# Altium PCB STM32_PCB.PcbDoc
Units mm, origin at the board's own origin, x right, y up, seen from the top; angles counter-clockwise.
Board outline 47 x 43 mm, 4 copper layers (L1 (Signal), L2 (GND), L3 (GND), L4 (Signal)), stack 1.591 mm thick; 47 components, 55 nets, 267 pads, 160 vias.
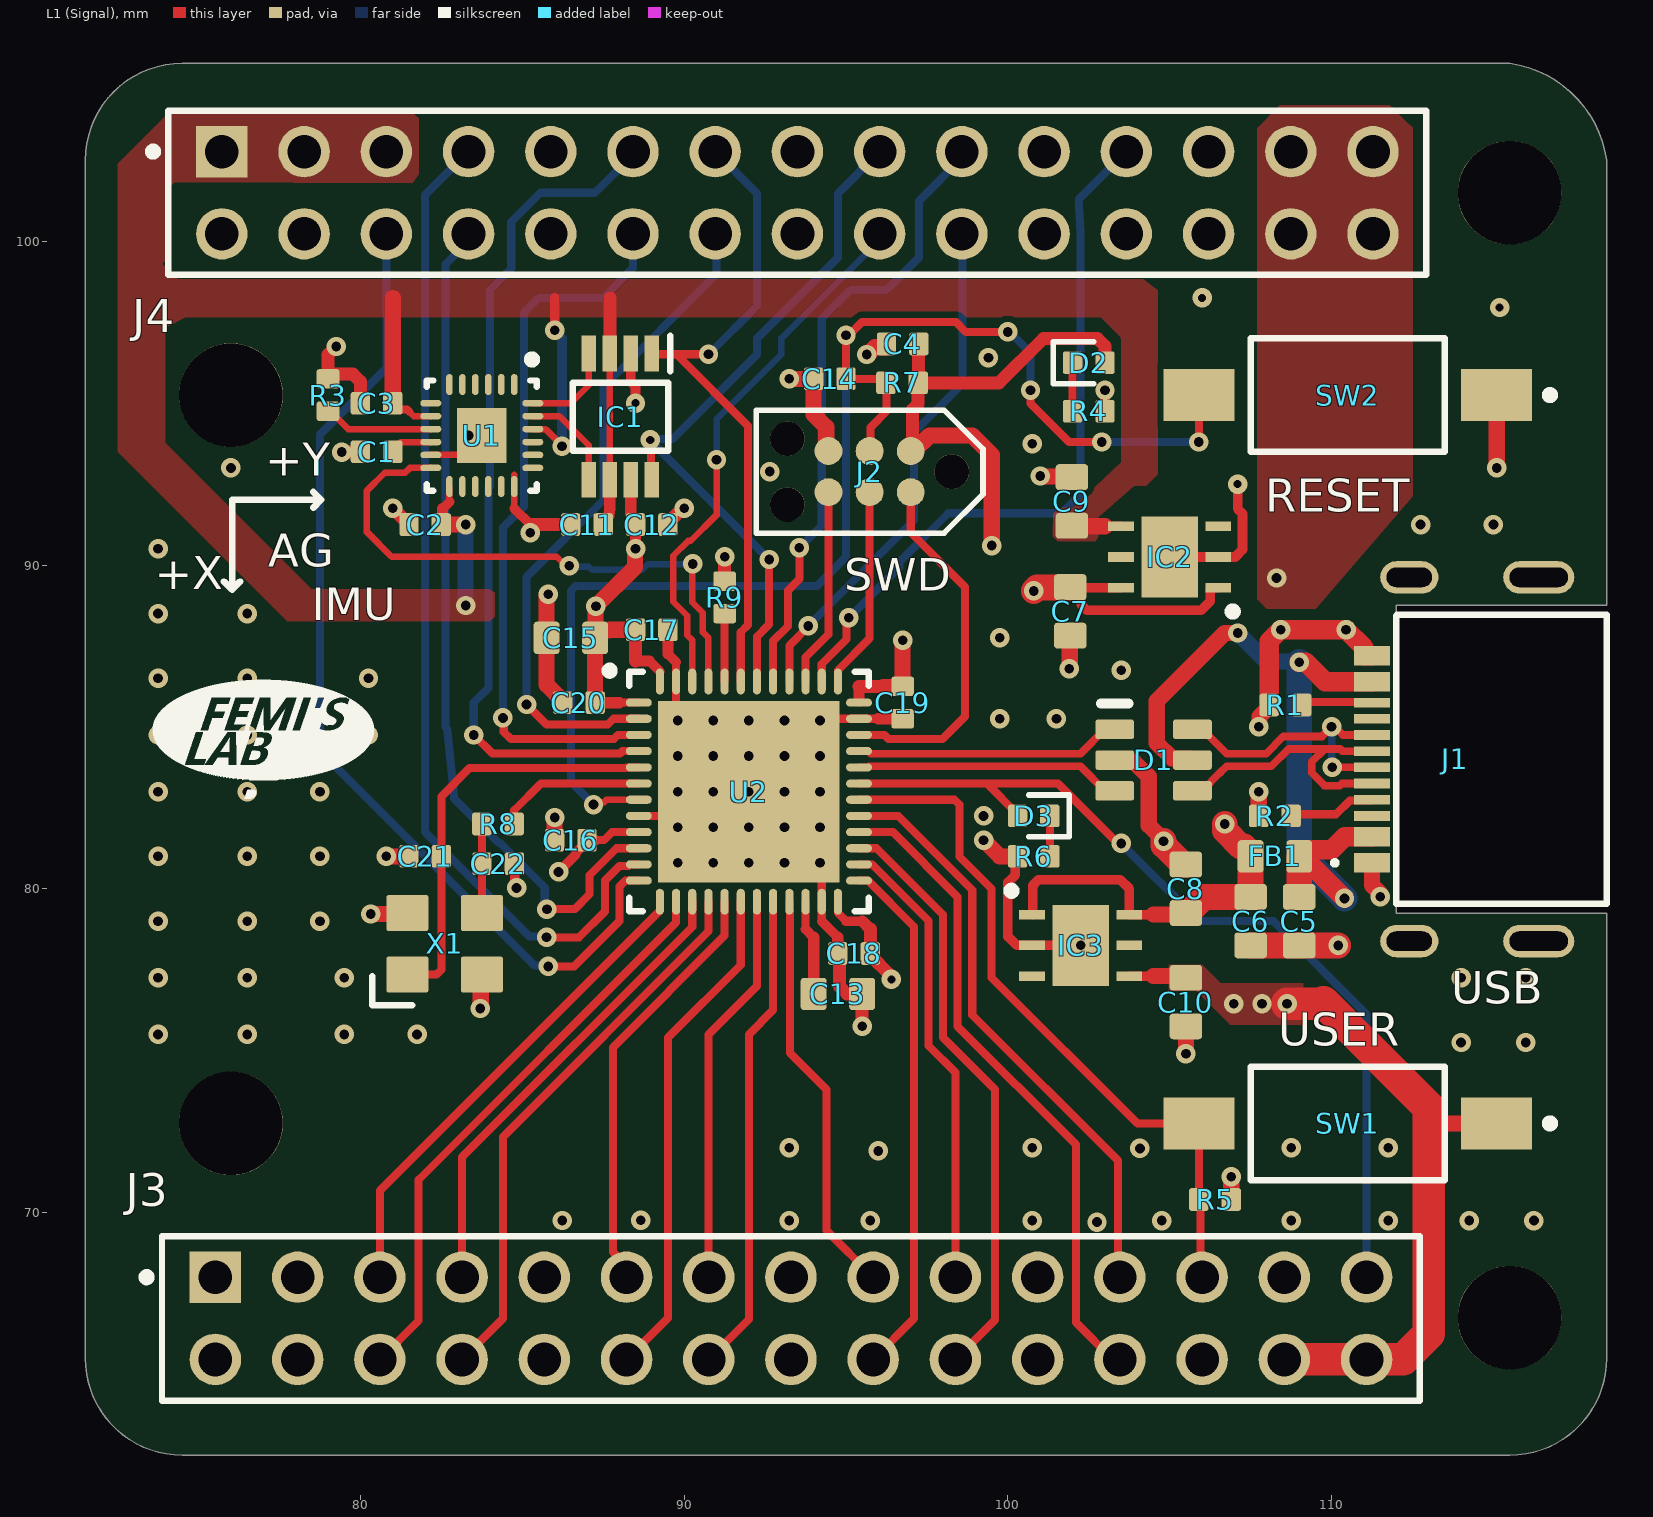
[diagram p0: L1 (Signal) view]
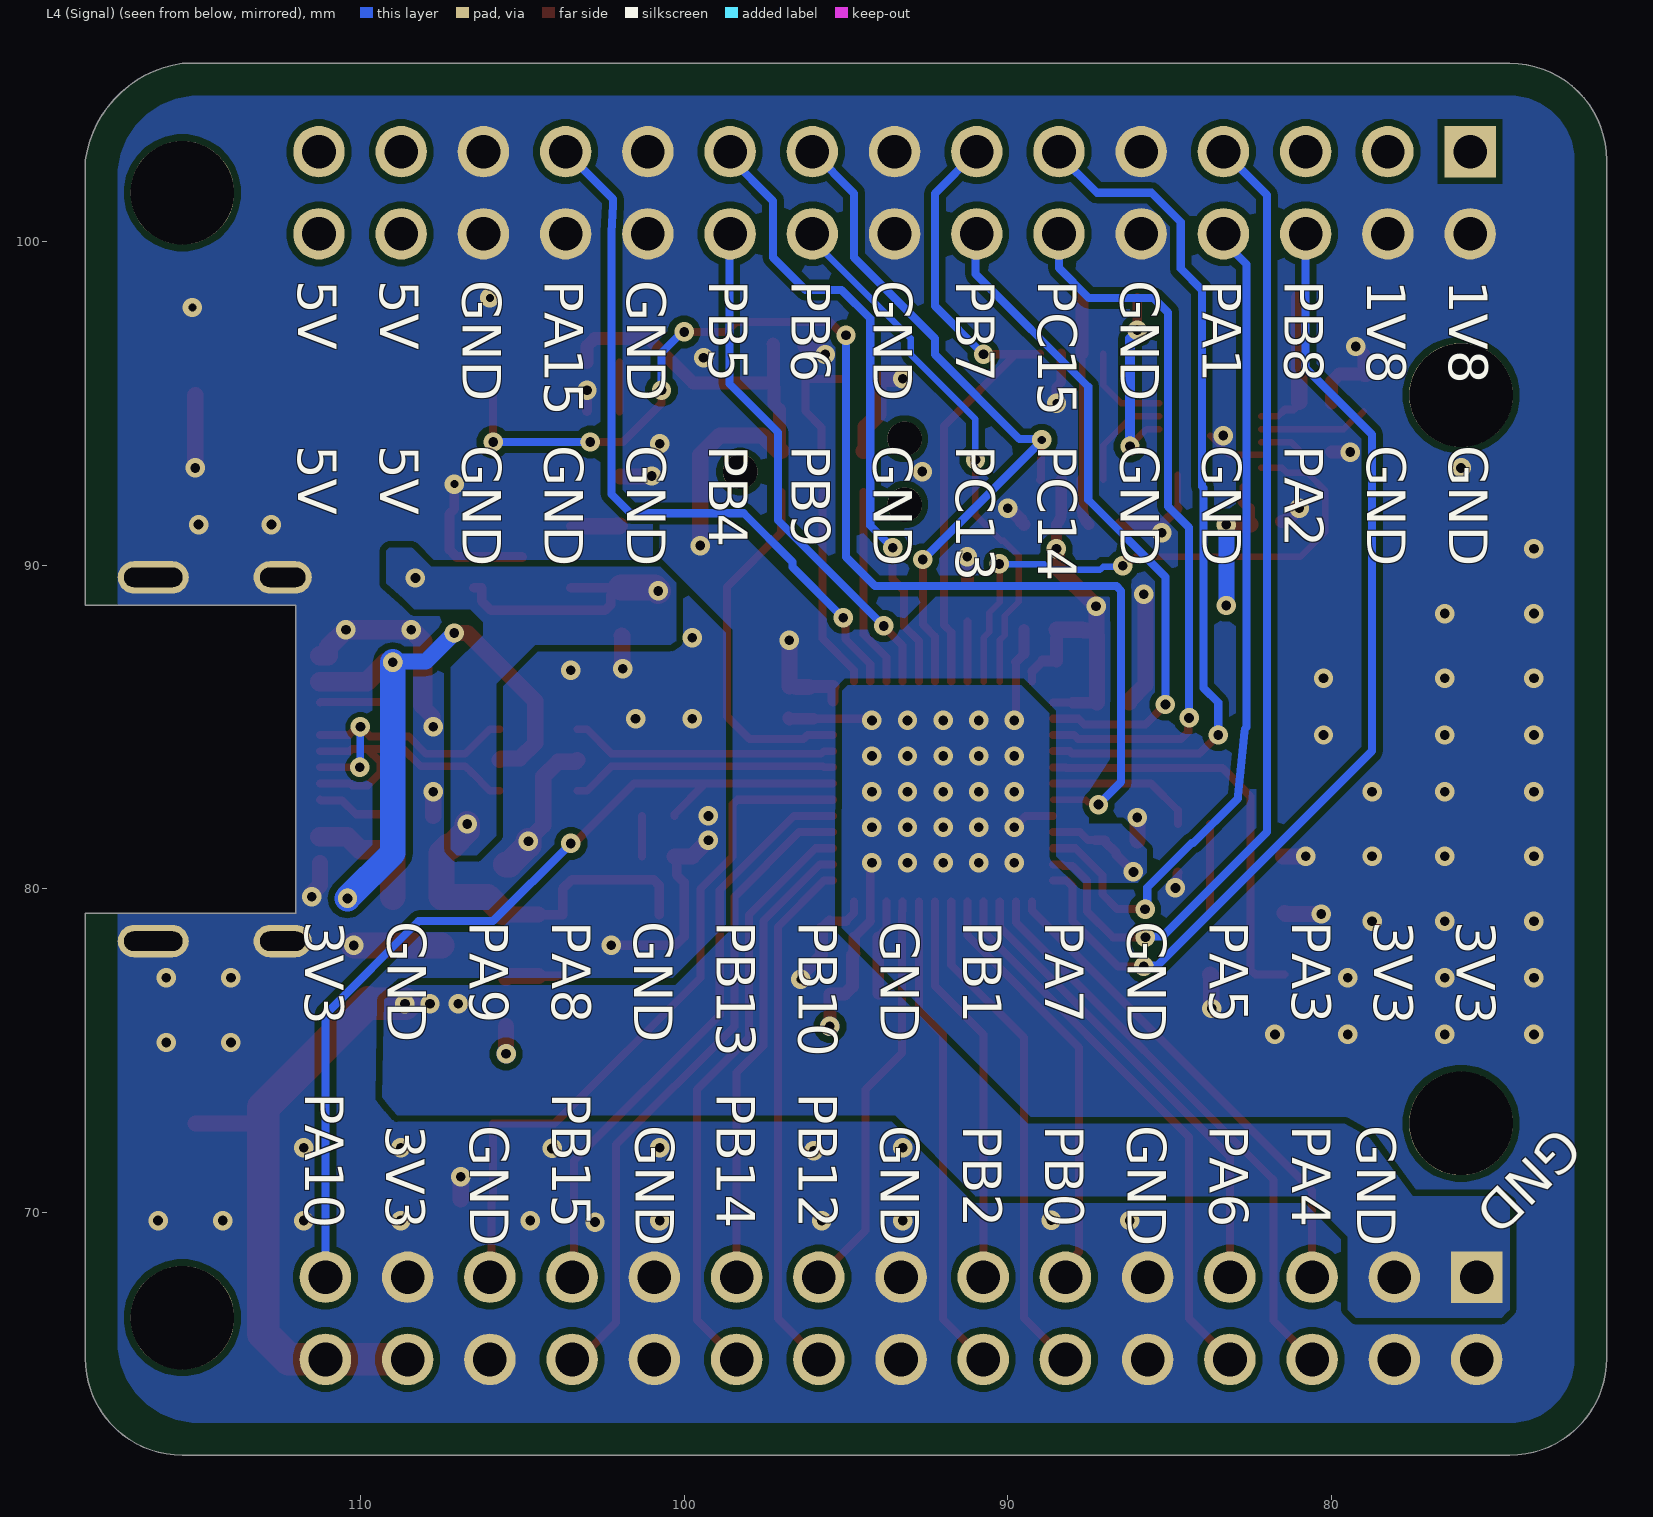
[diagram p1: L4 (Signal) view, seen from below]
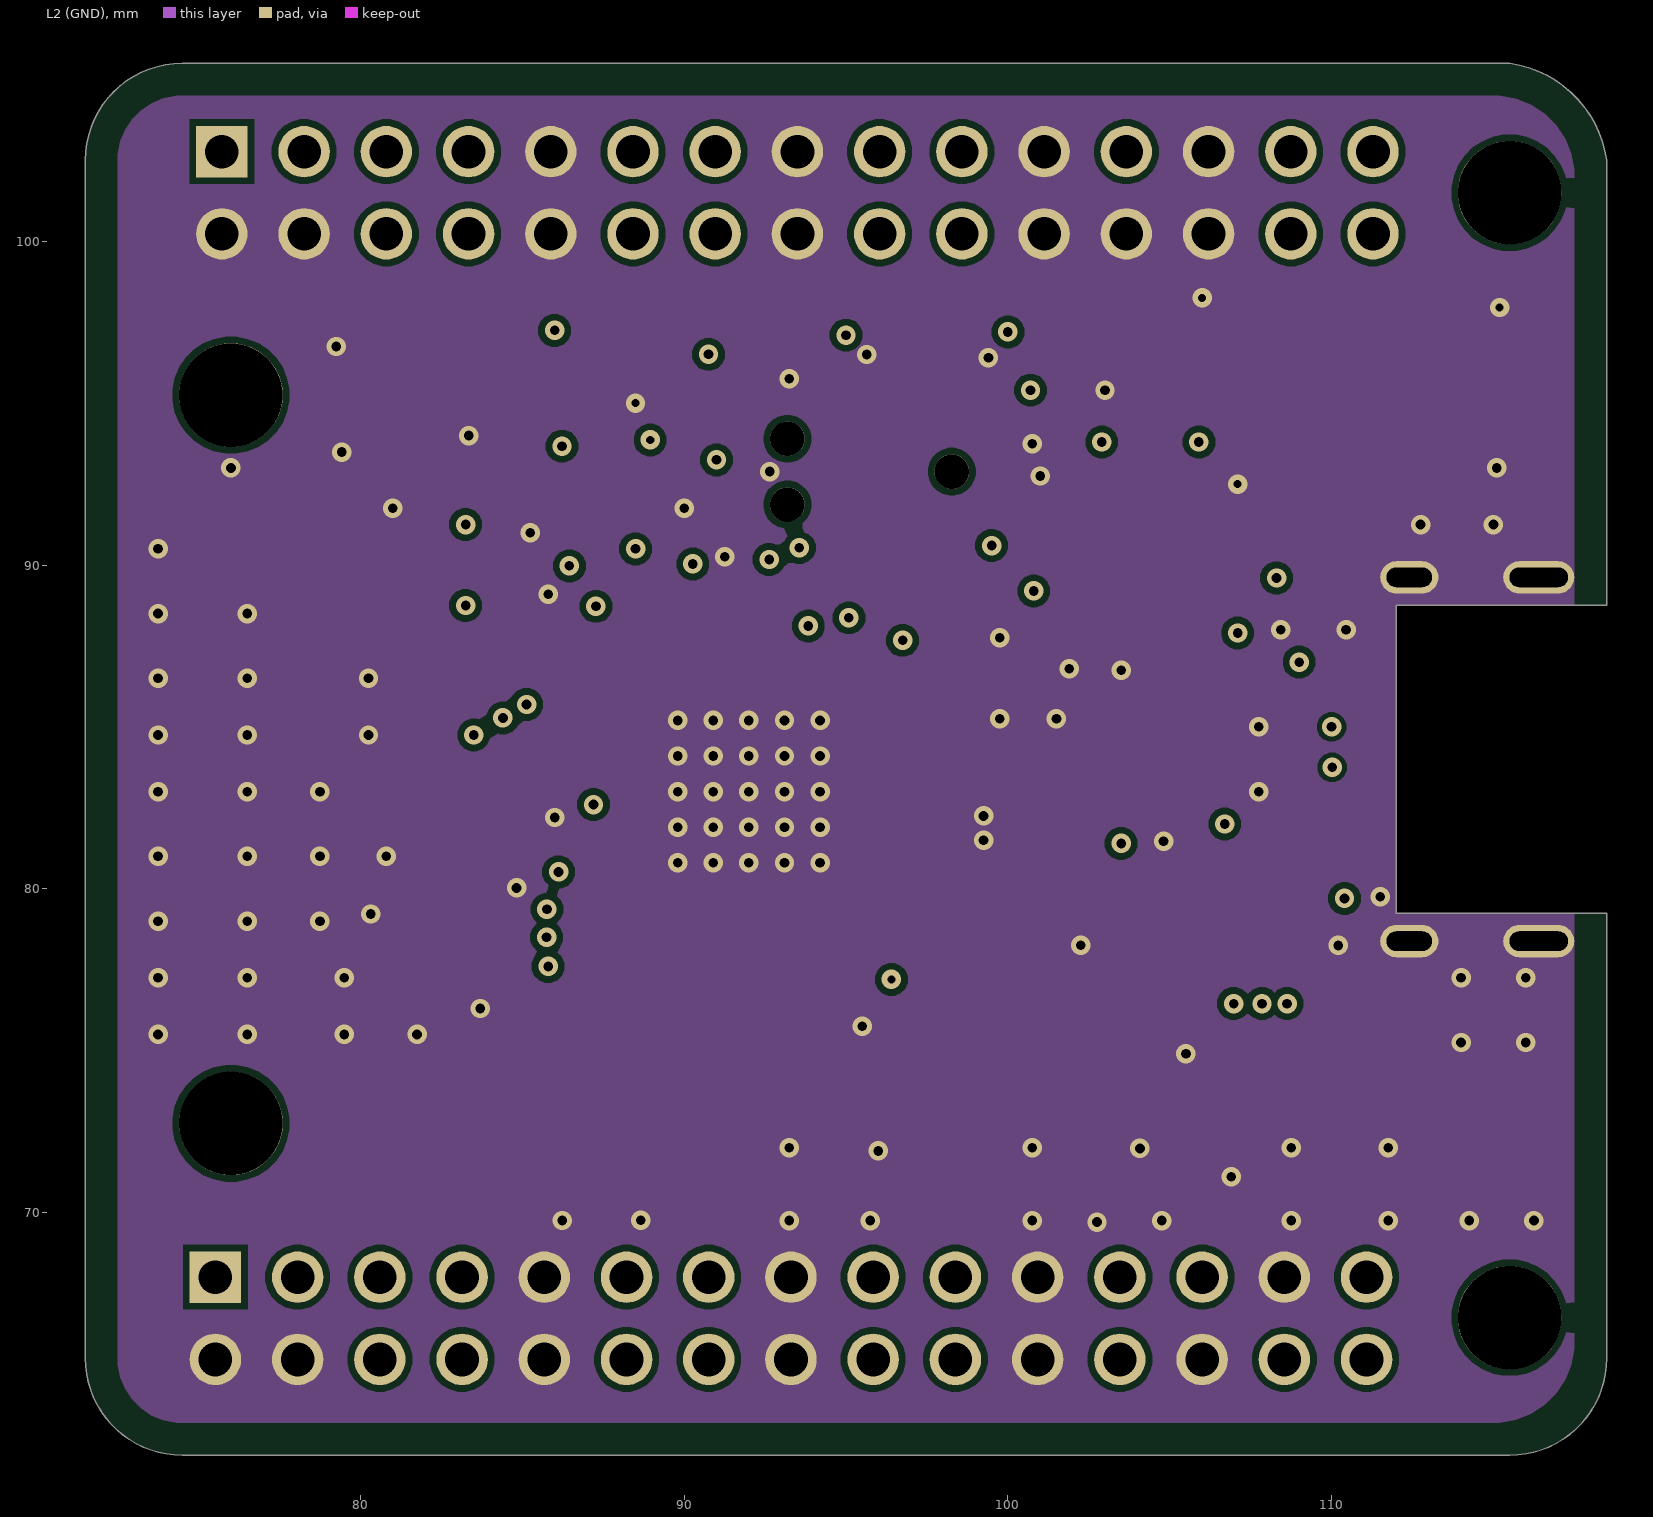
[diagram p2: L2 (GND)]
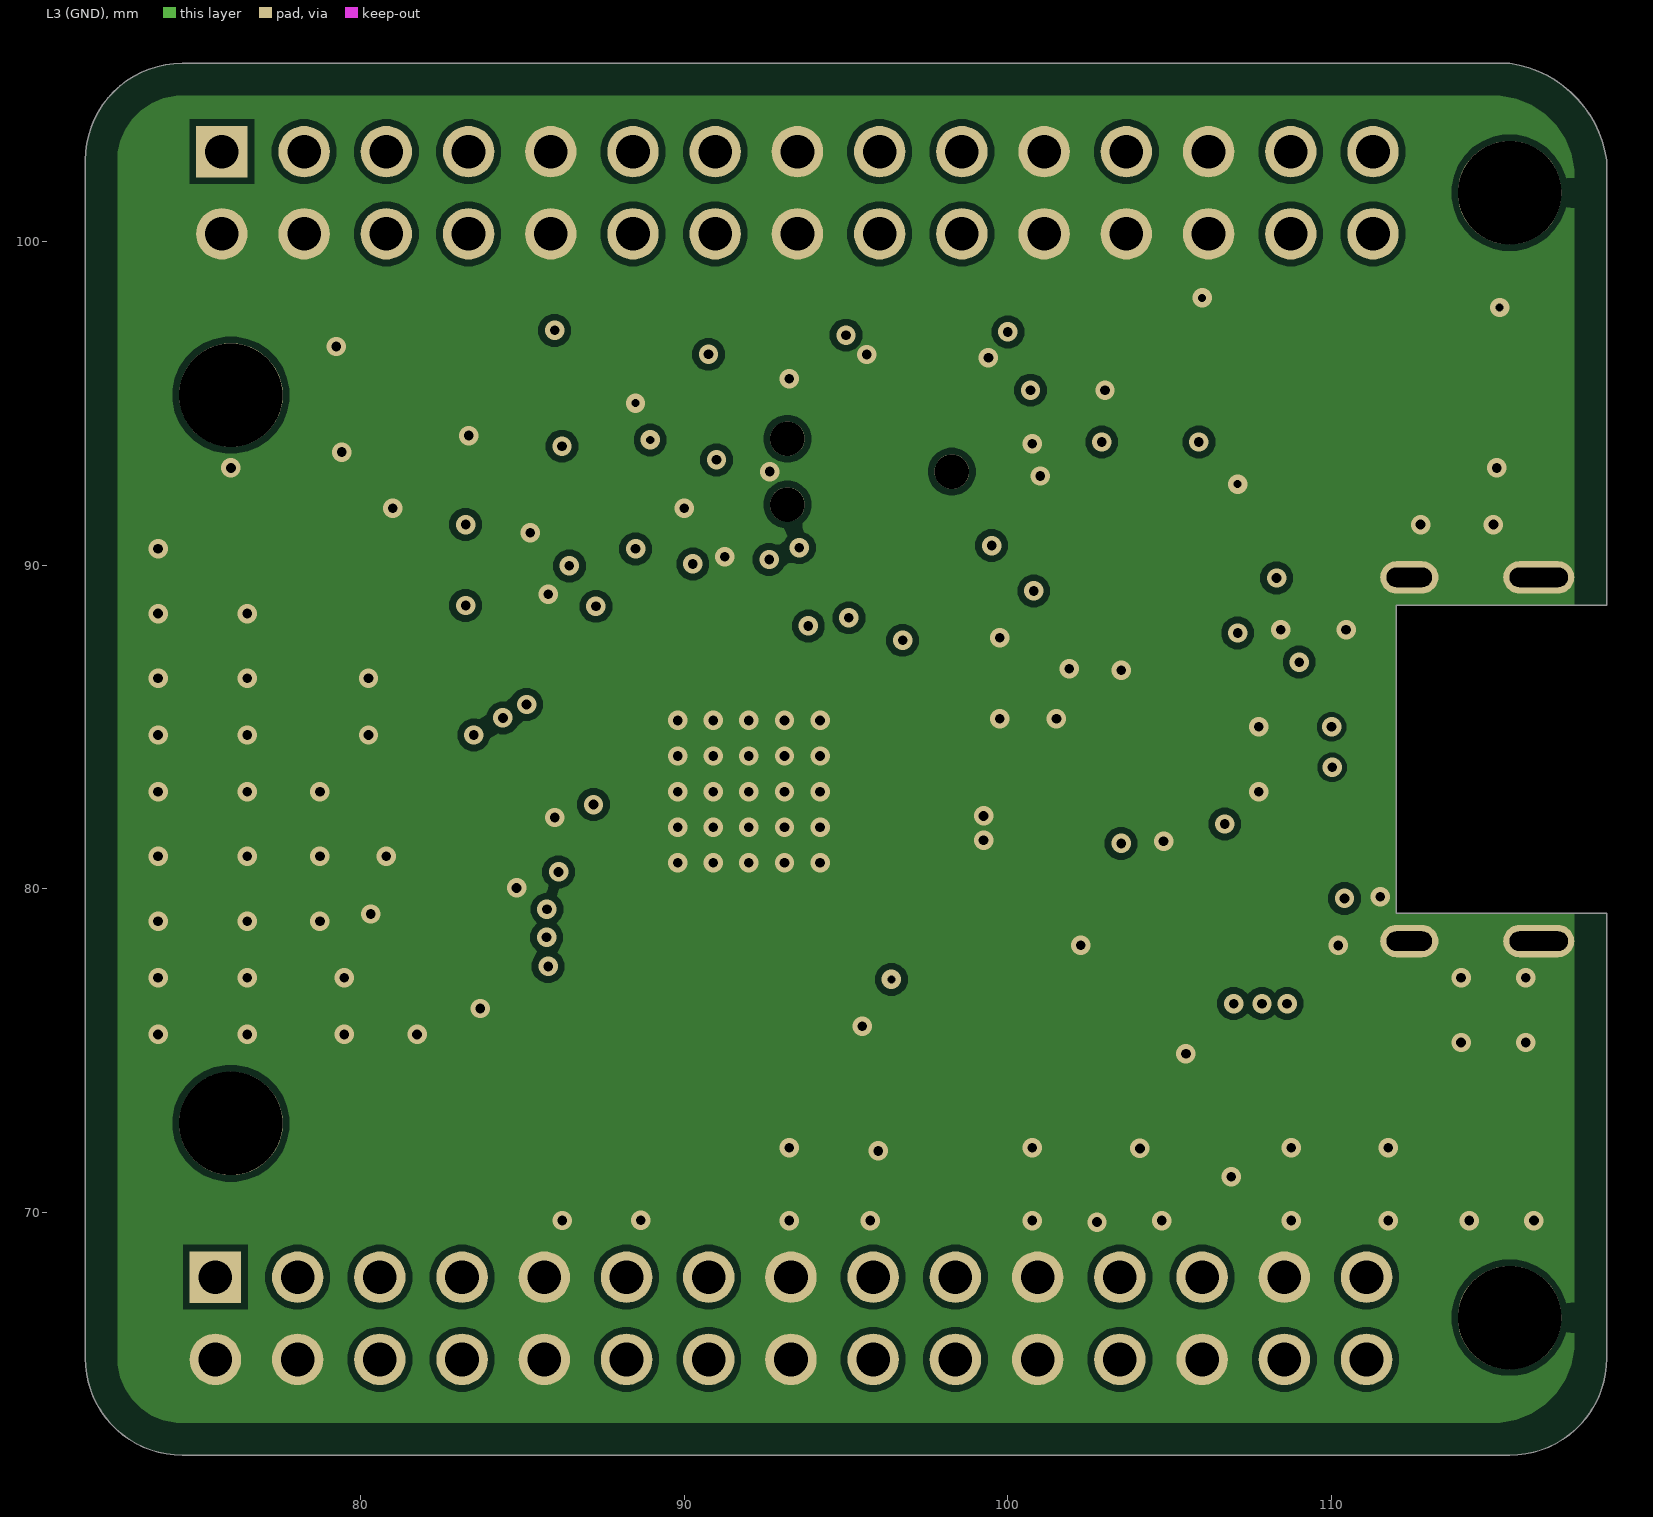
[diagram p3: L3 (GND)]
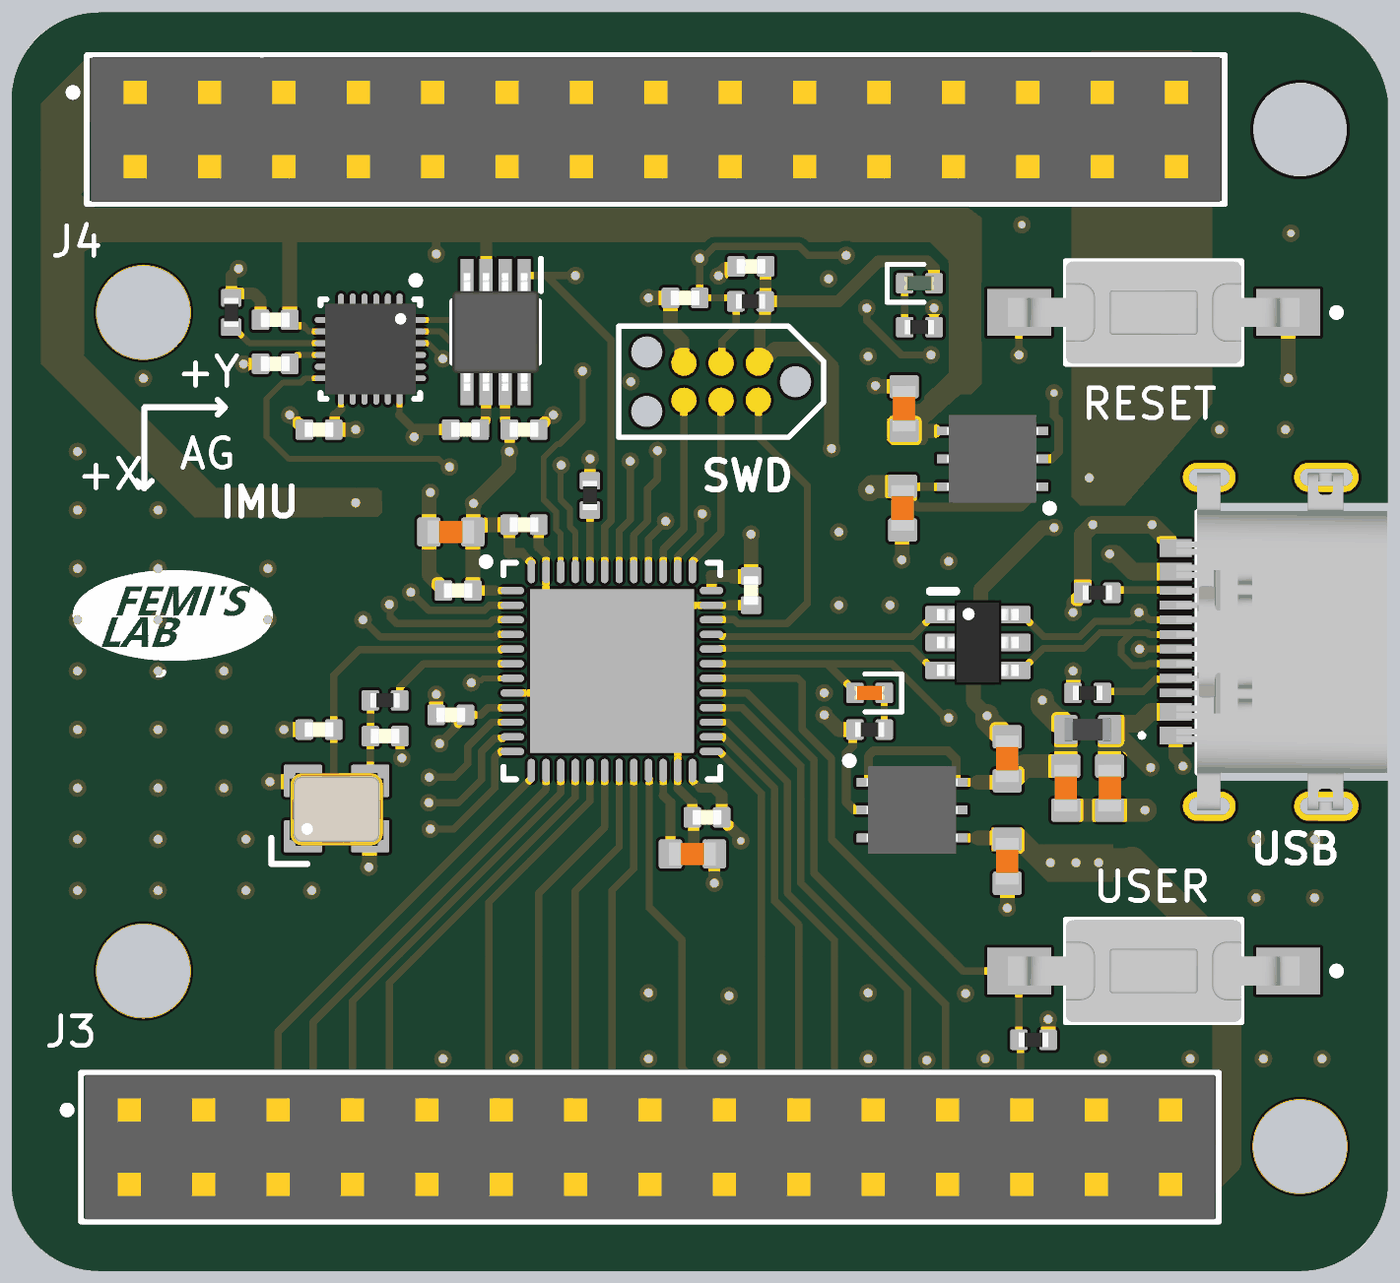
[diagram p4: 3D render of the assembled board from above, using the file's embedded part models]

## Layer stack, top to bottom
Top Solder: solder mask 0.0254, SM-001, Dk 4
L1 (Signal): signal copper 0.035
Dielectric 1: prepreg 0.2104, PP-017, Dk 4.4
L2 (GND): signal copper 0.0175
Dielectric 3: core 1.065, Core-039, Dk 4.6
L3 (GND): signal copper 0.0175
Dielectric 5: prepreg 0.2104, PP-017, Dk 4.4
L4 (Signal): signal copper 0.035
Bottom Solder: solder mask 0.0254, SM-001, Dk 4

## Board outline
71.5,65.5 71.5,102.5 cw(c74.5,102.5) 74.5,105.5 115.5,105.5 cw(c115,102) 118.5,102.5 118.5,88.75 112,88.75 112,79.25 118.5,79.25 118.5,65.5 cw(c115.5,65.5) 115.5,62.5 74.5,62.5 cw(c74.5,65.5)

## Design rules (kind name [scope] priority, off if disabled: settings)
Clearance USB_DP_Clearance [(InNet('ESD_USB_D_N') OR InNet('ESD_USB_D_P') OR InNet('USB_D_N') OR InNet('USB_D_P'))] p1: gap=0.15 ignorepadtopadclearanceinfootprint=FALSE
Clearance [All] p2: gap=0.2 ignorepadtopadclearanceinfootprint=FALSE
DiffPairsRouting [All] p1: maxlimit=0.152 minlimit=0.127 mostfreqgap=0.152 toplayer_mingap=0.152 toplayer_minwidth=0.235 toplayer_maxwidth=0.235 toplayer_prefwidth=0.235 bottomlayer_mingap=0.152 bottomlayer_minwidth=0.235 bottomlayer_maxwidth=0.235 bottomlayer_prefwidth=0.235 impedanceprofiledriven=TRUE impedanceprofileid={366350EE-0790-4BE7-8783-D614B65B4645} impedanceprofilevalue=90.000000 maxuncoupledlength=12.7
HoleSize [All] p1: absolutevalues=TRUE maxlimit=4 minlimit=0.025 maxpercent=80.000 minpercent=20.000
MinimumSolderMaskSliver [All] p1: minsoldermaskwidth=0.01
PolygonConnect [All] p1: connectstyle=Direct reliefconductorwidth=0.254 reliefentries=4 polygonreliefangle="90 Angle" airgapwidth=0.254
RoutingVias [All] p1: holewidth=0.3 width=0.7 viastyle="Through Hole" minholewidth=0.2 minwidth=0.3 maxholewidth=0.4 maxwidth=0.9
SilkToSolderMaskClearance [IsPad] p1: minsilkscreentomaskgap=0.1 clearancetoexposedcopper=TRUE
SolderMaskExpansion [All] p1: expansion=0.102 istentingtop=FALSE
SupplyNets "Schematic Supply Nets_4" [InNet('+3V3')] p1: voltage=0.000
SupplyNets "Schematic Supply Nets_3" [InNet('GND')] p2: voltage=0.000
SupplyNets "Schematic Supply Nets_2" [InNet('+5V')] p3: voltage=0.000
SupplyNets "Schematic Supply Nets_1" [InNet('+1V8')] p4: voltage=0.000
SupplyNets "Schematic Supply Nets" [InNet('VBUS')] p5: voltage=0.000
UnRoutedNet [All] p1: checkbadconnections=TRUE
Width [All] p1: maxlimit=1 minlimit=0.2 preferedwidth=0.3 midlayer1_minwidth=0.254 midlayer1_maxwidth=0.254 midlayer1_prefwidth=0.254 midlayer2_minwidth=0.254 midlayer2_maxwidth=0.254 midlayer2_prefwidth=0.254 minimp=50.000000 maximp=50.000000 favimp=50.000000
25 further rules are at their usual default settings.

## Classes and differential pairs
differential pair class DIFF_USB_ESD: ESD_USB_D
differential pair class DIFF_USB: USB_D
differential pair ESD_USB_D: +ESD_USB_D_P -ESD_USB_D_N
differential pair USB_D: +USB_D_P -USB_D_N

## Components (designator, comment, footprint, x,y, rotation, side; value= is the part's Value field where it differs from the comment)
C1 "100n" CAP_0402 80.5,93.5 r180 top
C2 "100n" CAP_0402 82,91.25 r180 top
C3 "100n" CAP_0402 80.5,95 r180 top
C4 "100n" CAP_0402 96.75,96.828 r180 top
C5 "2u2" CAP_0603 109,79 r90 top
C6 "2u2" CAP_0603 107.5,79 r90 top
C7 "1u" CAP_0603 101.928,88.568 r90 top
C8 "1u" CAP_0603 105.5,80 r270 top
C9 "1u" CAP_0603 101.978,91.966 r270 top
C10 "1u" CAP_0603 105.5,76.5 r90 top
C11 "100n" CAP_0402 87,91.25 r180 top
C12 "100n" CAP_0402 89,91.25 r0 top
C13 "2u2" CAP_0603 94.75,76.75 r180 top
C14 "100n" CAP_0402 94.5,95.75 r180 top
C15 "2u2" CAP_0603 86.5,87.75 r0 top
C16 "100n" CAP_0402 86.5,81.5 r180 top
C17 "100n" CAP_0402 89,88 r0 top
C18 "100n" CAP_0402 95.25,78 r180 top
C19 "100n" CAP_0402 96.75,85.75 r270 top
C20 "100n" CAP_0402 86.75,85.75 r180 top
C21 "10p" CAP_0402 82,81 r180 top
C22 "10p" CAP_0402 84.255,80.775 r0 top
D1 "USBLC6-2SC6" SOT-23-6 104.5,83.975 r270 top
D2 "GREEN" LED_0402_GREEN 102.5,96.25 r180 top
D3 "RED" LED_0402_RED 100.8,82.25 r0 top
FB1 "FB0603" FB_0603 108.25,81 r180 top
IC1 "TCA9406DCTR" SOP65P400X130-8N 88.028,94.584 r270 top
IC2 "LD39100PU18RY" SON95P300X300X90-7N-D 105,90.25 r180 top
IC3 "LD39100PU33RY" SON95P300X300X90-7N-D 102.25,78.25 r0 top
J1 "216990-0003" 2169900003 115.25,84 r90 top
J2 "TC2030-NL" TC2030-NL-FP 95.73,92.885 r180 top
J3 "SSW-115-02-G-D" FP-SSW-115-02-G-D-MFG 93.3,66.73 r180 top
J4 "SSW-115-02-G-D" FP-SSW-115-02-G-D-MFG 93.5,101.5 r180 top
R1 "5.1k" RES_0402 108.575,85.675 r0 top
R2 "5.1k" RES_0402 108.25,82.25 r0 top
R3 "0R" RES_0402 79,95.25 r270 top
R4 "1k" RES_0402 102.5,94.75 r180 top
R5 "10k" RES_0402 106.4,70.4 r180 top
R6 "1k" RES_0402 100.8,81 r180 top
R7 "10k" RES_0402 96.733,95.628 r0 top
R8 "0R" RES_0402 84.25,82 r180 top
R9 "10k" RES_0402 91.25,89 r270 top
SW1 "USER" TECO-FSMSM-2_V 110.5,72.75 r180 top
SW2 "RESET" TECO-FSMSM-2_V 110.5,95.25 r180 top
U1 "ICM-20948" TDK-QFN-24_L 83.75,94 r270 top
U2 "STM32F411CEU6" STM-UFQFPN48_L 92,83 r0 top
X1 "24MHz" XTAL_3225 82.6,78.3 r0 top

## Footprints (in the part's own frame and the unit in brackets; to place one, negate y for a bottom-side part, rotate by r counter-clockwise, add the part's x,y. Pads: shape width x height; smd on the part's side, far side on the other; paste and mask are expansions set on the pad)
2169900003 [mm]
  rect 0.6x1.1 smd: A1(-3.2,4) A4(-2.4,4) A9(2.4,4) A12(3.2,4)
  rect 0.3x1.1 smd: A5(-1.25,4) A6(-0.25,4) A7(0.25,4) A8(1.25,4) B5(1.75,4) B6(0.75,4) B7(-0.75,4) B8(-1.75,4)
  oval 1x1.8 hole 0.6 slot 1.4 at 90 deg: MH1(-5.62,2.85) MH4(5.62,2.85)
  oval 1x2.2 hole 0.6 slot 1.8 at 90 deg: MH2(-5.62,-1.15) MH3(5.62,-1.15)
  silkscreen extent -4.47,-3.25 4.47,5.2, body extent -5.77,-3.23 5.77,3.98, height 2.16
CAP_0402 [mm]
  rrect25% 0.6x0.7 smd: 1(-0.5,0) 2(0.5,0)
  body extent -0.5,-0.26 0.5,0.26, height 0.37
CAP_0603 [mm]
  rrect25% 0.8x1 smd: 1(-0.75,0) 2(0.75,0)
  body extent -0.8,-0.4 0.8,0.4, height 0.51
FB_0603 [mm]
  rrect25% 0.8x1 smd: 1(-0.75,0) 2(0.75,0)
  body extent -0.8,-0.4 0.8,0.4, height 0.81
FP-SSW-115-02-G-D-MFG [mm]
  rect 1.59x1.59 hole 1.04 paste-2539.97 mask+0: 1(17.78,-1.27)
  round 1.59 hole 1.04 paste-2539.97 mask+0: 2(17.78,1.27) 3(15.24,-1.27) 4(15.24,1.27) 5(12.7,-1.27) 6(12.7,1.27) 7(10.16,-1.27) 8(10.16,1.27) 9(7.62,-1.27) 10(7.62,1.27) 11(5.08,-1.27) 12(5.08,1.27) 13(2.54,-1.27) 14(2.54,1.27) 15(0,-1.27) 16(0,1.27) 17(-2.54,-1.27) 18(-2.54,1.27) 19(-5.08,-1.27) 20(-5.08,1.27) 21(-7.62,-1.27) 22(-7.62,1.27) 23(-10.16,-1.27) 24(-10.16,1.27) 25(-12.7,-1.27) 26(-12.7,1.27) 27(-15.24,-1.27) 28(-15.24,1.27) 29(-17.78,-1.27) 30(-17.78,1.27)
  silkscreen extent -19.43,-2.54 20.03,2.54, body extent -19.53,-2.64 19.53,2.64, height 0.25
LED_0402_GREEN [mm]
  rrect25% 0.6x0.7 smd: A(-0.5,0) K(0.5,0)
  silkscreen extent -0.15,-0.65 1.1,0.65, body extent -0.51,-0.25 0.51,0.25, height 0.45
LED_0402_RED [mm]
  rrect25% 0.6x0.7 smd: A(-0.5,0) K(0.5,0)
  silkscreen extent -0.15,-0.65 1.1,0.65, body extent -0.51,-0.25 0.51,0.25, height 0.45
RES_0402 [mm]
  rrect25% 0.6x0.7 smd: 1(-0.5,0) 2(0.5,0)
  body extent -0.5,-0.25 0.5,0.25, height 0.3
SON95P300X300X90-7N-D [mm]
  rect 0.8x0.3 smd: 1(-1.5,0.95) 2(-1.5,0) 3(-1.5,-0.95) 4(1.5,-0.95) 5(1.5,0) 6(1.5,0.95)
  rect 1.75x2.5 smd: 7(0,0)
  silkscreen extent -2.07,1.56 -1.82,1.81, body extent -1.55,-1.5 1.55,1.5, height 0.9
SOP65P400X130-8N [mm]
  rect 1.1x0.45 smd: 1(-1.95,0.975) 2(-1.95,0.325) 3(-1.95,-0.325) 4(-1.95,-0.975) 5(1.95,-0.975) 6(1.95,-0.325) 7(1.95,0.325) 8(1.95,0.975)
  silkscreen extent -2.5,-1.48 1.05,1.55, body extent -2.01,-1.48 2.01,1.48, height 0.91
SOT-23-6 [mm]
  rrect25% 0.6x1.2 smd: 1(-0.95,-1.2) 2(0,-1.2) 3(0.95,-1.2) 4(0.95,1.2) 5(0,1.2) 6(-0.95,1.2)
  silkscreen extent -1.75,-1.63 -1.75,-0.76, body extent -1.45,-1.4 1.45,1.4, height 1.45
STM-UFQFPN48_L [mm] "QFN, 48-Leads, Body 7.1x7.1mm, Pitch 0.5mm, Thermal Pad 5.6x5.6mm, IPC High Density"
  oval 0.8x0.25 smd: 1(-3.4,2.75) 2(-3.4,2.25) 3(-3.4,1.75) 4(-3.4,1.25) 5(-3.4,0.75) 6(-3.4,0.25) 7(-3.4,-0.25) 8(-3.4,-0.75) 9(-3.4,-1.25) 10(-3.4,-1.75) 11(-3.4,-2.25) 12(-3.4,-2.75) 25(3.4,-2.75) 26(3.4,-2.25) 27(3.4,-1.75) 28(3.4,-1.25) 29(3.4,-0.75) 30(3.4,-0.25) 31(3.4,0.25) 32(3.4,0.75) 33(3.4,1.25) 34(3.4,1.75) 35(3.4,2.25) 36(3.4,2.75)
  oval 0.25x0.8 smd: 13(-2.75,-3.4) 14(-2.25,-3.4) 15(-1.75,-3.4) 16(-1.25,-3.4) 17(-0.75,-3.4) 18(-0.25,-3.4) 19(0.25,-3.4) 20(0.75,-3.4) 21(1.25,-3.4) 22(1.75,-3.4) 23(2.25,-3.4) 24(2.75,-3.4) 37(2.75,3.4) 38(2.25,3.4) 39(1.75,3.4) 40(1.25,3.4) 41(0.75,3.4) 42(0.25,3.4) 43(-0.25,3.4) 44(-0.75,3.4) 45(-1.25,3.4) 46(-1.75,3.4) 47(-2.25,3.4) 48(-2.75,3.4)
  rect 5.6x5.6 smd: 49(0,0)
  silkscreen extent -4.43,-3.7 3.7,3.86, body extent -3.55,-3.55 3.55,3.55, height 0.6
TC2030-NL-FP [mil]
  round 33.98 smd paste-16.99: 1(-50,-25) 2(-50,25) 3(0,-25) 4(0,25) 5(50,-25) 6(50,25)
  round 42.01 hole 42.01 unplated: MH(-100,0) MH(100,-40) MH(100,40)
  silkscreen extent -138,-75 138,75
TDK-QFN-24_L [mm] "QFN, 24-Leads, Body 3.10x3.10mm, Pitch 0.40mm, Thermal Pad 1.70x1.54mm, IPC High Density"
  oval 0.65x0.2 smd: 1(-1.575,1) 2(-1.575,0.6) 3(-1.575,0.2) 4(-1.575,-0.2) 5(-1.575,-0.6) 6(-1.575,-1) 13(1.575,-1) 14(1.575,-0.6) 15(1.575,-0.2) 16(1.575,0.2) 17(1.575,0.6) 18(1.575,1)
  oval 0.2x0.65 smd: 7(-1,-1.575) 8(-0.6,-1.575) 9(-0.2,-1.575) 10(0.2,-1.575) 11(0.6,-1.575) 12(1,-1.575) 19(1,1.575) 20(0.6,1.575) 21(0.2,1.575) 22(-0.2,1.575) 23(-0.6,1.575) 24(-1,1.575)
  rect 1.7x1.54 smd: 25(0,0)
  silkscreen extent -2.47,-1.7 1.7,1.7, body extent -1.55,-1.55 1.55,1.55, height 1.05
TECO-FSMSM-2_V [mm] "SMD, 2-Leads, Body 6x3.5mm, Pitch 9.19mm"
  rect 2.2x1.6 smd: 1(-4.595,0)
  rect 2.18x1.6 smd: 2(4.595,0)
  silkscreen extent -6.37,-1.75 3,1.75, body extent -4.98,-1.75 4.98,1.75, height 4.4
XTAL_3225 [mm]
  rrect10% 1.3x1.1 smd: 1(-1.15,-0.95) 2(1.15,-0.95) 3(1.15,0.95) 4(-1.15,0.95)
  silkscreen extent -2.23,-1.89 -1,-1, body extent -1.6,-1.28 1.6,1.22, height 0.61

## Part data
C1 C2 C3 C4 C11 C12 C14 C16 C17 C18 C19 C20 C21 C22: library part CAP_0402, "Capacitor SMD 0402"
C5 C6 C7 C8 C9 C10 C13 C15: library part CAP_0603, "Capacitor SMD 0603"
D1: "Low-Capacitance ESD Protection USB", Manufacturer=STMicroelectronics, Distributor Link=https://www.mouser.de/ProductDetail/STMicroelectronics/USBLC6-2SC6?qs=po45yt2pPpu%2FhNIlwQdTlg%3D%3D, Manufacturer Part Number=USBLC6-2SC6
D2: library part LED_0402_GREEN, "LED 0402 GREEN SMD"
D3: library part LED_0402_RED, "LED 0402 RED SMD"
FB1: library part FB_0603, "Ferrite Bead SMD 0603"
IC1: "Integrated Circuit", Manufacturer_Name="Texas Instruments", Mouser Part Number=595-TCA9406DCTR, Arrow Part Number=TCA9406DCTR, Arrow Price/Stock=https://www.arrow.com/en/products/tca9406dctr/texas-instruments?region=nac, Datasheet Link=http://www.ti.com/lit/ds/symlink/tca9406.pdf, Height=1.3mm, Manufacturer_Part_Number=TCA9406DCTR, Mouser Price/Stock=https://www.mouser.co.uk/ProductDetail/Texas-Instruments/TCA9406DCTR?qs=Ze4%2FuFuz19L6Yntu0RTUyw%3D%3D
IC2: "Integrated Circuit", Manufacturer_Name=STMicroelectronics, Mouser Part Number=511-LD39100PU18RY, Arrow Part Number=LD39100PU18RY, Arrow Price/Stock=https://www.arrow.com/en/products/ld39100pu18ry/stmicroelectronics, Datasheet Link=https://www.st.com/resource/en/datasheet/ld39100.pdf, Height=0.9mm, Manufacturer_Part_Number=LD39100PU18RY, Mouser Price/Stock=https://www.mouser.co.uk/ProductDetail/STMicroelectronics/LD39100PU18RY?qs=aVyJF2WnouREkLb6JvLi6A%3D%3D
IC3: "Integrated Circuit", Manufacturer_Name=STMicroelectronics, Mouser Part Number=511-LD39100PU33RY, Arrow Part Number=LD39100PU33RY, Arrow Price/Stock=https://www.arrow.com/en/products/ld39100pu33ry/stmicroelectronics?region=nac, Datasheet Link=http://www.st.com/content/ccc/resource/technical/document/datasheet/72/02/e5/ee/df/36/40/5e/CD00233788.pdf/files/CD00233788.pdf/jcr:content/translations/en.CD00233788.pdf, Height=0.9mm, Manufacturer_Part_Number=LD39100PU33RY, Mouser Price/Stock=https://www.mouser.co.uk/ProductDetail/STMicroelectronics/LD39100PU33RY?qs=xwQlLnDx56AZF44f%2FmwzdQ%3D%3D
J1: "Connector", Manufacturer_Name=Molex, Mouser Part Number=538-216990-0003, Arrow Part Number=216990-0003, Arrow Price/Stock=https://www.arrow.com/en/products/216990-0003/molex?region=nac, Datasheet Link=https://www.molex.com/pdm_docs/sd/2169900003_sd.pdf, Height=3.36mm, Manufacturer_Part_Number=216990-0003, Mouser Price/Stock=https://www.mouser.co.uk/ProductDetail/Molex/216990-0003?qs=DRkmTr78QASn0GILUGAYCA%3D%3D
J2: "Tag-Connect No-Solder SWD Debug Connector (No Legs) DO NOT PLACE", Manufacturer=Tag-Connect, Manufacturer Part Number=TC2030-NL-FP
J3 J4: library part CMP-00575-00296320-1, "SSW-115-02-G-D SSW - Samtec 2.54mm Dual Row Straight Socket Strip 8.5mm Profile (mcv)(TO22)", Color=Black, Contact Resistance=10mΩ, Current Rating=6.9A, Manufacturer Lifecycle Status=PRODUCTION, Voltage Rating=550V, Voltage Rating (AC)=465V, Voltage Rating (DC)=655V, Connector Type="Receptacle, Socket", Contact Material=Bronze, Contact Plating=Gold, Gender=Receptacle, Housing Color=Black, Housing Material=Plastic, Lead Free="Lead Free", Lead Pitch=2.54mm, Lifecycle Status=Production, Mount="Through Hole", NexarPartId=296320, Number of Contacts=30, Number of Positions=30, Number of Rows=2, Orientation=Straight, Packaging=Bulk, Pitch=2.54mm, Radiation Hardening=No, REACH SVHC="No SVHC", RoHS=Compliant, Row Spacing=2.54mm, Termination=Solder
R1 R2 R3 R4 R5 R6 R7 R8 R9: library part RES_0402, "Resistor SMD 0402"
SW1 SW2: library part CMP-2000-07511-1, "FSMSM Push Button Switch, 50 mA, -35 to 85 degC, 2-Pin SMD, RoHS, Bulk", Case\/Package=SMD/SMT, Contact Current Rating=50mA, Contact Resistance=100mOhm, Manufacturer="TE Connectivity", Max Operating Temperature=85degC, Max Voltage Rating (DC)=12V, Min Operating Temperature=-35degC, Operating Force=180gf, Package Description="2-Pin Surface Mount Device, Body 6 x 3.5 mm, Pitch 9.19 mm", Package Quantity=1000, Package Reference=FSMSM, Voltage Rating (DC)=24V, Actuator Length=1.07mm, Actuator Material=Polyamide, Contact Material=Brass, Contact Plating=Silver, Current Rating=50mA, Datasheet URL=http://www.te.com/commerce/DocumentDelivery/DDEController?Action=showdoc&DocId=Customer+Drawing%7F1437566-3%7FC2%7Fpdf%7FEnglish%7FENG_CD_1437566-3_C2_1437566_3_1_c.dwg.pdf%7F1437566-3, Datasheet Version="Rev. C2, 08/2014", Electrical Life=20000Cycles, ELV=Compliant, Illumination Type=Illuminated, Lead Free=LeadFree, Manufacturer URL=http://www.te.com/, Mechanical Life=20000Cycles, Mount=SurfaceMount, Mounting Technology=SurfaceMount, Orientation=Straight, Packaging=LoosePiece, REACH SVHC=Unknown, RoHSCompliant=true, Switch Travel=0.25mm, Termination=GullWing, Throw Configuration=SPST
U1: library part CMP-2000-07532-1, "World’s Lowest Power 9-Axis MEMS MotionTracking(TM) Device, 1.71 to 3.6 V, -40 to 85 degC, 24-Pin QFN, RoHS, Tape and Reel", Manufacturer=TDK, Package Description="24-Pin Quad Flat No-lead Package, Body 3 x 3 mm, Pitch 0.4 mm", Package Reference=QFN-24, Datasheet URL=https://www.invensense.com/wp-content/uploads/2016/06/DS-000189-ICM-20948-v1.3.pdf, Datasheet Version="Rev. 1.3, 06/2017", Manufacturer URL=http://www.tdk.com/, Mounting Technology=SurfaceMount
U2: library part CMP-0243-00165-1, "ARM Cortex-M4 32-bit MCU+FPU, 512 KB Flash, 128 KB RAM, 36 I/Os, 48-Pin UFQFPN, -40 to 85 degC, Tray", I/Os (High Current)=36, Operating Frequency(F) (Processor speed) (MHz)=100, Package Description=UFQFPN48, Package Reference="48-Pin Ultra Thin Fine Pitch Quad Flat No-Lead, 7 x 7 x 0.6 mm Body, 0.5 mm Pitch, Exposed Pad", Supply Voltage(Vcc) min (V)=1.7, ComponentLink1Description="Manufacturer URL", ComponentLink1URL=http://www.st.com/, ComponentLink2Description=Datasheet, ComponentLink2URL=http://www.st.com/st-web-ui/static/active/en/resource/technical/document/datasheet/DM00115249.pdf, Core="ARM Cortex-M4", DatasheetVersion="Rev. 6", FLASH Size (Prog) (kB)=512, Internal RAM Size (kB)=128, Mounting Technology="Surface Mount", Packing=Tray
X1: library part TSX-3225_24.0000MF15X-AC, "Crystal SMD 24MHz 10PPM 7pF 3225", Manufacturer=Epson, Manufacturer Part Number="TSX-3225 24.0000MF15X-AC"

## Free pads (board coordinates)
  round 3.2 hole 3.2: MH(76,72.75) MH(76,95.25) MH(115.5,66.75)
  round 3.2 hole 3.2 unplated: MH(115.5,101.5)

## Via types
v1: diameter 0.6, hole 0.3, L1 (Signal) to L4 (Signal), tented both sides, 129 vias
v2: diameter 0.6, hole 0.3, L1 (Signal) to L4 (Signal), 25 vias
v3: diameter 0.6, hole 0.25, L1 (Signal) to L4 (Signal), tented both sides, 4 vias
v4: diameter 0.6, hole 0.25, L1 (Signal) to L4 (Signal), 2 vias

## Nets (pads, with @x,y where several pads share a name; then routed paths per layer and width w, separated by ;. In a path a pad name is that pad's centre, name@x,y a point inside that pad or via, vN(x,y) a via of type N, cw(c..) or ccw(c..) an arc to the next point about the centre after c; other vN are vias at no path point)
+1V8: C2.1 C3.1 C9.2 C11.1 IC1.3 IC1.6 IC2.4 J4.1 J4.3 J4.5 U1.8 U1.13 U1.22 | length 23.9
  L1 (Signal) w0.2: 81.5,94.75 81.65,94.6 U1.8 ; 82.75,91.951 U1.13 ; U1.22 85.716,94.2 86.226,93.69 v1(86.226,93.67) ; IC1.6 IC1.3
  L1 (Signal) w0.25: C3.1 81,94.982 81.175,94.807 81.443,94.807 81.5,94.75
  L1 (Signal) w0.3: 82.537,91.738 82.75,91.951 ; v1(86,97.25) 86,98.25 ; 103,91.2 IC2.4
  L1 (Signal) w0.35: C2.1 82.537,91.287 82.537,91.738 ; C11.1 ccw(c87.01,91.74) 87.703,91.74 IC1.6
  L1 (Signal) w0.4: IC1.3 87.707,96.538 87.707,98.25
  L1 (Signal) w0.5: C3.1@81,95.039 81,98.25 ; C2.1 v1(83.25,91.25) ; C9.2@102.078,91.216 C9.2 101.994,91.2 103,91.2
  L1 (Signal) w1: J4.1@75.425,102.75 75.445,102.77 J4.1
  L4 (Signal) w0.3: v1(86,97.25) 86,97.223 86.226,96.997 v1(86.226,93.67)
  L4 (Signal) w0.5: v1(83.25,88.75) v1(83.25,91.25)
+3V3: C4.1 C10.2 C12.1 C15.2 C16.1 C17.1 C18.1 C19.1 C20.1 D2.A IC1.7 IC3.4 J2.1 J3.1 J3.3 J3.28 J3.30 R7.2 SW1.1 U2.1 U2.9 U2.24 U2.36 U2.48 | length 59.1
  L1 (Signal) w0.25: 87.3,81.5 87.527,81.5 87.777,81.75 U2.9 ; 88,85.75 U2.1 ; U2.48 U2.48@89.25,86.71 ; U2.24 94.75,79.25 95,79 ; 96.132,86.25 96.15,86.232 ; C19.1@96.525,86.232 C19.1
  L1 (Signal) w0.3: v1(86.12,80.519) 86.65,81.049 86.65,81.1 87,81.45 C16.1 87.138,81.5 ccw(c87.138,82.354) 87.15,81.5 87.3,81.5 ; 88.923,87.037 U2.48@89.25,86.71 ; 95,79 95.5,79 ; IC3.4 104.5,77.3 ; 113,73.25 113.5,72.75
  L1 (Signal) w0.35: C20.1 88,85.75 ; IC1.7 88.353,91.605 ccw(c88.855,91.605) C12.1 v1(88.5,90.5) ; 88.5,87.037 88.923,87.037 ; U2.36@95.4,85.809 95.4,86.25 ; 95.5,79 95.75,78.75
  L1 (Signal) w0.4: 88.5,87.037 C17.1@88.5,87.75 ; 95.4,86.25 96.132,86.25 ; 95.75,78.75 C18.1 95.75,77.95 96.362,77.338 96.362,77.238 v3(96.4,77.2) ; J2.1@97.051,93.571 97.051,94.802 97.228,94.978 R7.2@97.228,95.478 ; R7.2 99.728,95.628 101.1,97 102.766,97 103,96.766 D2.A ; R7.2@97.241,95.637 97.241,96.82 C4.1
  L1 (Signal) w0.5: C20.1 C15.2 87.25,87.825 C15.2@87.263,87.837 ; C17.1 87.693,88 87.668,87.975 87.4,87.975 C15.2@87.263,87.837 ; v1(88.5,90.5) 88.481,90.481 88.481,89.931 v1(87.275,88.725) 87.263,88.712 C15.2@87.263,87.837 ; 96.15,86.232 C19.1@96.525,86.232 ; C19.1 v1(96.75,87.675) ; J2.1 97.098,93.52 97.578,94 98.9,94 99.5,93.4 v1(99.5,90.6) ; 104.5,77.3 105.45,77.3 C10.2 ; 113.5,72.75 SW1.1
  L1 (Signal) w1: J3.28 J3.30 112.21,65.46 113,66.25 113,73.25 109.75,76.5 109.7,76.45 v1(108.625,76.45)
  other v1: 106.975,76.45 107.85,76.45
+5V: C6.2 C7.2 C8.2 FB1.2 IC2.1 IC2.6 IC3.1 IC3.6 J4.27 J4.28 J4.29 J4.30 | length 20
  L1 (Signal) w0.3: IC3.1@100.769,79.2 100.769,80.103 100.945,80.279 103.471,80.279 103.75,80 IC3.6 104.5,79.2 ; C7.2 102.014,89.318 C7.2@102.032,89.3 ; C7.2@101.946,89.3 C7.2@102.032,89.3 ; C7.2@102.2,89.146 C7.2@102.2,89.3 ; IC2.6 C7.2@102.2,89.3 ; IC2.1 106.25,89.3 106.25,88.88 105.97,88.6 102.44,88.6 102.264,88.776 102.264,89.068 C7.2@102.032,89.3 ; C7.2@102.032,89.3 C7.2@102.2,89.3
  L1 (Signal) w0.5: 104.5,79.2 105.519,79.2 C8.2@105.6,79.281
  L1 (Signal) w0.8: v1(100.8,89.2) 100.9,89.3 C7.2@101.946,89.3 ; C8.2@105.6,79.281 106.069,79.75 C6.2 FB1.2 107.5,81.1 107.3,81.3 107.2,81.3 106.7,81.8 v1(106.7,82)
  other v1: 108.3,89.6
ESD_USB_D_N: D1.3 U2.32 | length 8.2
  L1 (Signal) w0.235: U2.32 95.679,83.75 95.71,83.781 97.219,83.781 102.244,83.781 103,83.025 D1.3
ESD_USB_D_P: D1.1 U2.33 | length 8.2
  L1 (Signal) w0.235: U2.33 95.679,84.25 95.76,84.169 97.379,84.169 102.244,84.169 103,84.925 D1.1
GND: C1.2 C2.2 C3.2 C4.2 C5.1 C6.1 C7.1 C8.1 C9.1 C10.1 C11.2 C12.2 C13.1 C14.2 C15.1 C16.2 C17.2 C18.2 C19.2 C20.2 C21.2 C22.2 D1.2 IC1.2 IC2.2 IC2.7 IC3.2 IC3.7 J1.A1 J1.A12 J1.MH1 J1.MH2 J1.MH3 J1.MH4 J2.5 J3.2 J3.4 J3.9 J3.10 J3.15 J3.16 J3.21 J3.22 J3.26 J3.27 J4.2 J4.4 J4.9 J4.10 J4.15 J4.16 J4.21 J4.22 J4.24 J4.25 J4.26 R1.1 R2.1 R3.1 R4.1 R5.1 R6.2 R9.1 SW2.1 U1.11 U1.18 U1.25 U2.8 U2.23 U2.35 U2.47 U2.49 X1.2 X1.4 | length 69.5
  L1 (Signal) w0.2: U1.11 83.15,93.4 U1.25 ; 84.75,91.75 U1.18 84.75,92.784
  L1 (Signal) w0.25: U2.8 89.45,82.25 v2(89.8,81.9) ; 89.75,87 U2.47 89.75,85.25 v2(89.8,85.2) ; v2(94.2,80.8) 94.25,80.75 U2.23 94.25,79.207 94.25,79 ; v2(94.2,85.2) 94.25,85.25 U2.35 96,85.25
  L1 (Signal) w0.3: C22.2@84.75,80.5 84.767,80.483 84.767,80.082 v1(84.824,80.024) ; 84.75,91.75 v1@85.25,91.25 ; IC1.2 88.353,95.647 88.5,95.5 88.5,95.003 v4(88.499,95.001) ; 89.5,87.25 89.75,87 ; 94.25,79 94.75,78.5 ; R6.2 100.229,80.929 100.229,80.429 100,80.2 100,78.526 100.276,78.25 IC3.2 v1(102.25,78.25) ; v1(101,92.75) v1@101.017,92.733 ; C9.1@101.961,92.733 C9.1 ; R4.1 v1(103,95.4) ; IC2.7 IC2.2 107.024,90.25 107.25,90.476 107.25,91.587 107.1,91.737 v3(107.1,92.5)
  L1 (Signal) w0.35: 89.5,87.25 C17.2 ; C18.2 94.75,78.5 ; 96,85.25 C19.2
  L1 (Signal) w0.4: R3.1@78.915,95.85 79,95.85 79,96.5 v1(79.25,96.75) ; R3.1@78.915,95.9 79.766,95.9 80,95.666 C3.2 ; v1(79.422,93.489) 79.428,93.495 79.995,93.495 C1.2 ; v1(81,91.75) 81.325,91.425 81.375,91.425 81.45,91.35 C2.2@81.55,91.35 ; v1(85.25,91) 85.25,91.25 C11.2 ; C12.2 89.6,91.35 89.6,91.4 89.95,91.75 v1(90,91.75) ; R9.1 91.25,90.25 v1(91.255,90.255) ; C18.2 94.8,77.95 94.8,76.984 95.034,76.75 C13.1 v1(95.5,75.75) ; C19.2 C19.2@96.768,85.268
  L1 (Signal) w0.5: v1(80.319,79.219) 81.419,79.219 X1.4 ; v1(80.8,81) C21.2 ; v1(83.7,76.3) 83.719,76.319 83.719,77.319 X1.2 ; v1(85.8,89.1) 85.8,89.073 85.75,89.023 C15.1 85.75,86.3 86.25,85.8 C20.2 ; C16.2 v1(86,82.2) ; v1(93.25,95.75) C14.2 94,94.65 94.391,94.259 94.391,93.589 J2.5 ; v1(95.644,96.504) 95.671,96.504 95.895,96.728 96.2,96.728 96.238,96.766 C4.2@96.25,96.766 ; v1(99.25,81.5) 99.75,81 R6.2 ; v1@101.017,92.733 C9.1@101.961,92.733 ; v1(101.9,86.8) 101.914,86.814 101.914,87.804 C7.1 ; D1.2 103.35,83.925 103.892,83.925 104.35,83.467 104.35,81.958 104.81,81.498 v1(104.81,81.471) ; v1(105.5,74.9) C10.1 ; R5.1 v1(106.9,71.1) ; R2.1 v1(107.75,83) ; v1(107.75,85) 107.769,85.019 107.769,85.319 108.075,85.625 R1.1 ; J1.A1 111.25,80.108 111.5,79.858 v1(111.5,79.75) ; SW2.1 115.1,95.245 v1(115.1,93)
  L1 (Signal) w0.6: R1.1 108.075,87.649 v1(108.426,88) v1(110.449,88) 111,87.449 111,87.2 J1.A12
  L1 (Signal) w0.8: v1(104.81,81.471) 104.81,81.34 105.4,80.75 C8.1 ; C6.1 110.204,78.25 v1(110.206,78.248)
  other v1: 102.755,69.703 86.231,69.75 93.25,69.75 95.75,69.75 100.75,69.75 104.75,69.75 108.75,69.75 111.75,69.75 114.25,69.75 116.25,69.75 88.66,69.762 96,71.9 104.079,71.978 93.25,72 100.75,72 108.75,72 111.75,72 114,75.25 116,75.25 73.75,75.5 76.5,75.5 79.5,75.5 81.75,75.5 73.75,77.25 76.5,77.25 79.5,77.25 114,77.25 116,77.25 73.75,79 76.5,79 78.75,79 73.75,81 76.5,81 78.75,81 99.25,82.25 73.75,83 76.5,83 78.75,83 73.75,84.75 76.5,84.75 80.25,84.75 99.75,85.25 101.5,85.25 73.75,86.5 76.5,86.5 80.25,86.5 103.5,86.75 99.75,87.75 73.75,88.5 76.5,88.5 73.75,90.5 112.75,91.25 115,91.25 92.648,92.887 76,93 100.75,93.75 83.35,94 99.4,96.4
  other v2: 89.8,80.8 90.9,80.8 92,80.8 93.1,80.8 90.9,81.9 92,81.9 93.1,81.9 94.2,81.9 89.8,83 90.9,83 92,83 93.1,83 94.2,83 89.8,84.1 90.9,84.1 92,84.1 93.1,84.1 94.2,84.1 90.9,85.2 92,85.2 93.1,85.2
  other v3: 115.189,97.956 106,98.25
IMU_I2C_AD0: R3.2 U1.9 | length 3.4
  L1 (Signal) w0.2: R3.2 79.2,94.55 79.276,94.55 79.626,94.2 U1.9
IMU_INT: U1.12 U2.45 | length 18
  L1 (Signal) w0.2: U1.12 81.53,93 81.38,92.85 80.75,92.85 80.2,92.3 80.2,91.017 80.962,90.255 86.064,90.255 86.346,89.973 v1(86.455,89.973) ; v1(90.267,90.035) 90.25,90.018 90.25,88.846 90.571,88.525 90.571,87.929 90.75,87.75 U2.45
  L4 (Signal) w0.2: v1(86.455,89.973) 86.477,89.951 87.055,89.951 87.155,89.851 88.699,89.851 88.874,90.025 90.257,90.025 v1(90.267,90.035)
IMU_REGOUT: C1.1 U1.10 | length 1.3
  L1 (Signal) w0.2: C1.1 81,93.55 81.25,93.8 U1.10
IMU_SCL_1V8: IC1.5 U1.23 | length 3.2
  L1 (Signal) w0.2: U1.23 86.15,94.6 87.053,93.697 IC1.5
IMU_SCL_3V3: IC1.8 J4.17 U2.42 | length 22.6
  L1 (Signal) w0.25: v4(88.952,93.865) 88.978,93.84 88.978,92.659 IC1.8 ; U2.42 92.25,87.786 92.625,88.161 v1(92.625,90.17)
  L4 (Signal) w0.25: v4(88.952,93.865) 88.983,93.896 89.646,93.896 92.25,96.5 92.25,97 94.75,99.5 94.75,101.48 J4.17 ; v4@88.965,93.853 88.965,93.833 v1@92.625,90.173
IMU_SDA_1V8: IC1.4 U1.24 | length 2.9
  L1 (Signal) w0.2: U1.24 86.5,95 87.053,95.553 IC1.4
IMU_SDA_3V3: IC1.1 J4.13 U2.43 | length 20.3
  L1 (Signal) w0.25: IC1.1 89.027,96.51 89.76,96.51 ; v1(90.753,96.51) 89.76,96.51 ; U2.43 91.75,87.923 91.975,88.148 91.975,94.295 89.76,96.51
  L4 (Signal) w0.25: v1(90.753,96.51) 90.76,96.51 92.25,98 92.25,101.48 J4.13
JTAG_SWCLK: J2.4 U2.37 | length 6.3
  L1 (Signal) w0.25: U2.37 94.75,86.75 95.73,87.73 J2.4
JTAG_SWDIO: J2.2 U2.34 | length 11.2
  L1 (Signal) w0.25: U2.34 96.184,84.75 96.309,84.625 97.981,84.625 98.675,85.319 98.675,89.325 97,91 J2.2
JTAG_SWO: J2.6 U2.39 | length 6.1
  L1 (Signal) w0.25: U2.39 93.75,87.15 94.46,87.86 J2.6
LED_PWR_K: D2.K R4.2 | length 1.5
  L1 (Signal) w0.25: R4.2 D2.K
MCU_BOOT0: R9.2 U2.44 | length 1.8
  L1 (Signal) w0.25: U2.44 R9.2@91.25,88.25
MCU_LED_A: D3.A J3.29 U2.31 | length 28.1
  L1 (Signal) w0.25: U2.31 99.35,83.25 ; D3.A 100.3,82.3 99.35,83.25 ; v1(103.5,81.4) 103.4,81.4 101.55,83.25 99.35,83.25
  L4 (Signal) w0.25: v1(103.5,81.4) 105.9,79 108.2,79 111.08,76.12 J3.29
MCU_LED_K: D3.K R6.1 | length 1.3
  L1 (Signal) w0.25: R6.1 D3.K
MCU_NRST: C14.1 J2.3 R7.1 SW2.2 U2.7 | length 44.2
  L1 (Signal) w0.2: v1(87.2,82.6) 87.277,82.677 87.527,82.677 87.6,82.75 U2.7 ; J2.3 J2.3@95.752,93.542
  L1 (Signal) w0.25: J2.3@95.752,93.542 95.752,94.251 96.25,94.75 96.25,95.75 C14.1 v1(95,97.1) 95.095,97.1 95.498,97.503 98.397,97.503 98.7,97.2 v1(100,97.2) ; v1(100.7,95.4) 100.7,94.984 101.884,93.8 v1(102.9,93.8) ; v1(105.9,93.8) 105.9,95.245 SW2.2
  L4 (Signal) w0.25: v1(87.2,82.6) 86.5,83.3 86.5,89.204 86.646,89.35 94.1,89.35 95,90.25 v1(95,97.1) ; v1(100,97.2) 100.058,97.2 100.7,96.558 v1(100.7,95.4) ; v1(102.9,93.8) v1(105.9,93.8)
MCU_OSC_IN: C21.1 U2.5 X1.1 | length 12.9
  L1 (Signal) w0.25: X1.1 82.354,77.35 82.5,77.496 C21.1 82.5,82.85 83.375,83.725 88.2,83.725 88.225,83.75 U2.5
MCU_OSC_OUT: R8.1 U2.6 | length 4.6
  L1 (Signal) w0.25: R8.1 84.75,82.425 85.575,83.25 U2.6
MCU_PA0: J4.8 U2.10 | length 26.4
  L1 (Signal) w0.25: v1(85.762,79.367) 85.77,79.375 86.625,79.375 87.082,79.832 87.082,80.418 87.914,81.25 U2.10
  L4 (Signal) w0.25: J4.8 83.34,100.005 82.625,99.29 82.625,84.989 82.675,84.939 82.684,84.851 82.886,82.88 82.895,82.792 82.958,82.729 84.272,81.415 84.318,81.415 85.695,80.038 85.695,79.434 v1(85.762,79.367)
MCU_PA1: J4.7 U2.11 | length 31
  L1 (Signal) w0.25: v1(85.75,78.5) 86.75,78.5 87.55,79.3 87.55,80.25 88,80.7 88.275,80.7 88.325,80.75 U2.11
  L4 (Signal) w0.25: J4.7 82,101.43 82,81.75 85.221,78.529 85.721,78.529 v1(85.75,78.5)
MCU_PA2: J4.6 U2.12 | length 31.1
  L1 (Signal) w0.25: v1(85.8,77.6) 86.6,77.6 88,79 88,80.064 88.186,80.25 U2.12
  L4 (Signal) w0.25: J4.6 80.8,96.084 78.75,94.034 78.75,84.25 85.373,77.627 85.746,77.627 v1@85.787,77.587
MCU_PA3: J3.5 U2.13 | length 15.2
  L1 (Signal) w0.25: J3.5 80.6,70.675 89.25,79.325 U2.13
MCU_PA4: J3.6 U2.14 | length 17.9
  L1 (Signal) w0.25: J3.6 81.8,66.66 81.8,71.009 89.75,78.959 U2.14
MCU_PA5: J3.7 U2.15 | length 14.5
  L1 (Signal) w0.25: J3.7 83.14,71.713 90.25,78.823 U2.15
MCU_PA6: J3.8 U2.16 | length 17.3
  L1 (Signal) w0.25: J3.8 84.4,66.72 84.4,72.336 90.75,78.686 U2.16
MCU_PA7: J3.11 U2.17 | length 13.2
  L1 (Signal) w0.25: J3.11 88.22,68.363 87.8,68.783 87.8,75.1 91.25,78.55 U2.17
MCU_PA8: J3.23 U2.29 | length 18.3
  L1 (Signal) w0.25: U2.29 96.614,82.25 98.9,79.964 98.9,76.1 103.4,71.6 103.4,68.06 J3.23
MCU_PA15: J4.23 U2.38 | length 22.3
  L1 (Signal) w0.25: U2.38 94.25,86.938 95.02,87.709 95.02,88.303 v1(95.087,88.37)
  L4 (Signal) w0.25: v1(95.087,88.37) 96.657,89.94 96.657,90.097 98.159,91.6 101.654,91.6 102.239,92.186 102.239,100.196 ; 102.24,100.196 102.24,100.23 102.24,100.282 102.239,100.283 102.2,101.103 102.2,101.31 102.273,101.383 J4.23
MCU_PB0: J3.12 U2.18 | length 15.6
  L1 (Signal) w0.25: J3.12 89.5,66.74 89.5,75.4 91.75,77.65 U2.18
MCU_PB1: J3.13 U2.19 | length 12.2
  L1 (Signal) w0.25: J3.13 90.75,68.01 90.75,75.5 92.25,77 U2.19
MCU_PB2: J3.14 U2.20 | length 15
  L1 (Signal) w0.25: J3.14 92,66.7 92,75.5 92.75,76.25 U2.20
MCU_PB4: J4.20 U2.40 | length 16
  L1 (Signal) w0.25: U2.40 93.25,87.514 93.835,88.099 v1(93.835,88.119)
  L4 (Signal) w0.25: v1(93.835,88.119) 97.1,91.384 97.1,94.1 98.6,95.6 J4.20@98.6,100.23
MCU_PB5: J4.19 U2.41 | length 19.4
  L1 (Signal) w0.25: U2.41 92.75,87.65 93.21,88.11 93.21,89.215 93.558,89.563 v1(93.558,90.533)
  L4 (Signal) w0.25: v1(93.558,90.533) 94.25,91.225 94.25,97.611 95.139,98.5 96.25,98.5 97.25,99.5 97.25,101.25 98.58,102.58 J4.19
MCU_PB9: J4.18 U2.46 | length 16.8
  L1 (Signal) w0.2: U2.46 90.25,87.684 90.1,87.834 90.1,88.43 89.667,88.863 89.667,90.283 90.134,90.75 90.207,90.75 91,91.543 v1(91,93.25)
  L4 (Signal) w0.2: v1(91,93.25) 91,94.5 93,96.5 93,97 96.04,100.04 J4.18
MCU_PB10: J3.17 U2.21 | length 12.7
  L1 (Signal) w0.25: U2.21 93.25,79.325 93.275,79.3 93.275,74.925 94.4,73.8 94.4,69.44 J3.17
MCU_PB12: J3.18 U2.25 | length 16.2
  L1 (Signal) w0.25: U2.25 95.675,80.25 97.1,78.825 97.1,66.72 J3.18
MCU_PB13: J3.19 U2.26 | length 14.2
  L1 (Signal) w0.25: U2.26 95.811,80.75 97.55,79.011 97.55,75.15 98.38,74.32 J3.19
MCU_PB14: J3.20 U2.27 | length 18.4
  L1 (Signal) w0.25: U2.27 95.948,81.25 98,79.198 98,75.4 99.6,73.8 99.6,66.68 J3.20
MCU_PB15: J3.24 U2.28 | length 20.4
  L1 (Signal) w0.25: U2.28 96.45,81.75 98.45,79.75 98.45,75.75 102.1,72.1 102.1,66.6 103.24,65.46 J3.24
MCU_PC13: J4.14 U2.2 | length 20.8
  L1 (Signal) w0.25: v1(85.133,85.692) 85.75,85.075 87.641,85.075 87.816,85.25 U2.2
  L4 (Signal) w0.25: v1(85.133,85.692) 85.133,89.633 87.516,92.016 87.516,95.509 91,98.992 91,100.19 J4.14
MCU_PC14: J4.12 U2.3 | length 22.5
  L1 (Signal) w0.25: v1(84.403,85.277) 84.426,85.253 84.426,84.845 84.646,84.625 87.827,84.625 87.952,84.75 U2.3
  L4 (Signal) w0.25: v1(84.403,85.277) 84.403,91.161 85.05,91.808 85.05,97.8 85.5,98.25 87.5,98.25 88.42,99.17 J4.12
MCU_PC15: J4.11 U2.4 | length 26.4
  L1 (Signal) w0.25: v1(83.5,84.75) 84.075,84.175 88.013,84.175 88.088,84.25 U2.4
  L4 (Signal) w0.25: v1(83.5,84.75) 83.5,85.75 83.953,86.203 83.953,92.378 84,92.425 84,98.5 84.658,99.158 84.658,100.592 85.566,101.5 87.25,101.5 88.42,102.67 J4.11
MCU_SW_USER: J3.25 R5.2 SW1.2 U2.30 | length 22
  L1 (Signal) w0.25: U2.30 98.354,82.75 98.5,82.604 98.5,81 99.5,80 99.5,77.25 104,72.75 SW1.2 105.9,72.745 R5.2 105.95,70.35 105.95,68.05 J3.25
MCU_VCAP1: C13.2 U2.22 | length 3
  L1 (Signal) w0.25: 93.75,78.75 U2.22
  L1 (Signal) w0.3: 93.75,78.75 94,78.5
  L1 (Signal) w0.35: C13.2 94,78.5
USB_CC1: J1.A5 R2.2 | length 2.7
  L1 (Signal) w0.25: R2.2 108.8,82.3 110.14,82.3 110.565,82.725 111.225,82.725 J1.A5
USB_CC2: J1.B5 R1.2 | length 2.2
  L1 (Signal) w0.25: R1.2 109.17,85.77 111.23,85.77 J1.B5
USB_D_N: D1.4 J1.A7 J1.B7 | length 9.1
  L1 (Signal) w0.235: D1.4 106,83.025 106.568,83.593 106.756,83.781 108.139,83.781 108.674,84.317 109.781,84.317 ; J1.B7 110.321,83.25 110.253,83.182 109.782,83.182 109.385,83.579 109.385,83.92 109.781,84.317 ; J1.A7 110.333,84.25 110.267,84.317 109.781,84.317
USB_D_P: D1.6 J1.A6 J1.B6 | length 8.8
  L1 (Signal) w0.235: D1.6 106,84.925 106.756,84.169 107.978,84.169 108.514,84.705 109.705,84.705 v1(110,85) 110.099,85 110.349,84.75 J1.B6 ; v1(110.018,83.749) J1.A6
  L4 (Signal) w0.235: v1(110,85) 110.009,84.991 110.009,83.758 v1(110.018,83.749)
VBUS: C5.2 D1.5 FB1.1 J1.A4 J1.A9 | length 24.4
  L1 (Signal) w0.5: D1.5 105.65,84.025 105.075,84.025 104.6,84.5 104.6,85.8 106.7,87.9 v1(107.1,87.9)
  L1 (Signal) w0.6: v1(109,87) 109.2,87 109.8,86.4 J1.A9 ; v1(110.4,79.7) 109.1,81 FB1.1 109,81.1 109.1,81.2 110,81.2 110.4,81.6 J1.A4
  L1 (Signal) w0.8: C5.2 FB1.1
  L4 (Signal) w0.5: v1(107.1,87.9) 107.981,87.019 108.981,87.019 v1(109,87)
  L4 (Signal) w0.8: v1(109,87) 109,81.1 v1(110.4,79.7)
XTAL_IN: C22.1 R8.2 X1.3 | length 2.8
  L1 (Signal) w0.25: X1.3 C22.1@83.75,80.775 ; C22.1 R8.2@83.755,82
pads on no net: IC2.3 IC2.5 IC3.3 IC3.5 J1.A8 J1.B8 J2.MH U1.1 U1.2 U1.3 U1.4 U1.5 U1.6 U1.7 U1.14 U1.15 U1.16 U1.17 U1.19 U1.20 U1.21

## Polygon pours and split planes (outlines as drawn)
+1V8 on L1 (Signal) "+1V8_L01_P011" (solid, pour order 11): 102.012,91.776 101.569,91.772 101.499,91.701 101.402,91.605 101.391,90.835 101.451,90.776 101.499,90.728 102.692,90.727 102.799,90.878 102.8,91.475 103.905,92.455 104.282,92.455 104.625,92.798 104.625,98.49 104.175,98.825 104.076,98.825 74.35,98.825 73.875,99.3 73.956,99.381 73.956,101.625 74.281,101.825 81.6,101.8 81.802,102.069 81.805,103.794 81.699,103.899 81.574,104.024 74.128,104.025 72.5,102.397 72.5,93.5 77.75,88.25 84.012,88.259 84.156,88.36 84.145,89.142 83.99,89.258 78.491,89.258 73.956,93.792 73.975,93.811 73.975,97.175 73.975,97.325 74.6,97.65 102.875,97.65 103.487,97.037 103.5,96.925 103.503,93.178
+5V on L1 (Signal) "+5V_L01_P012" (solid, pour order 12): 107.7,88.95 108,88.65 108.85,88.65 109.514,88.65 112.5,92.127 112.501,103.503 112.252,103.752 111.795,104.208 108.4,104.2 107.7,103.5
+3V3 on L1 (Signal) "+3V3_L01_P000" (solid, pour order 0): 104.975,77.65 106,77.65 106.575,77.075 109.125,77.075 109.125,75.8 106.875,75.8 105.825,76.85 104.975,76.85
GND on L4 (Signal) "GND_L04_P010" (solid, pour order 10): 117.5,88.75 112,88.75 112,79.25 117.5,79.25 117.5,66.04 cw(c114.96,66.04) 114.96,63.5 74.5,63.5 cw(c74.5,65.5) 72.5,65.5 72.5,102.5 cw(c74.5,102.5) 74.5,104.5 114.96,104.5 cw(c114.96,101.96) 117.5,101.96
+3V3 on L4 (Signal) "+3V3_L04_P001" (solid, pour order 1): 95.25,88 93.25,88 92.114,89.136 87.011,89.139 86.939,89.066 86.858,88.986 86.843,87.537 86.858,84.003 87.5,83 87.5,82 86.5,82 85.715,81.215 85.715,80.404 85.933,80.186 87.686,80.186 88.5,81 88.5,85.5 89.502,86.502 95.033,86.502 95.339,86.196 95.35,78.705 89.395,72.75 79.594,72.742 79.25,72.551 78.819,72.3 77.5,70.5 76.588,70.5 74.7,70.5 74.752,70.5 74.5,70.3 74.5,67 74.752,66.75 74.658,66.752 79.25,66.75 79.5,67 79.5,69.25 80.75,70.5 91,70.5 91,70.52 93.48,73 108.86,73.004 109.088,73.259 109.33,73.554 109.271,76.569 108.75,77.025 100.275,77.025 98.5,78.8 98.5,88 100.75,90.25 100.75,91.25 98.5,91.25
+5V on L4 (Signal) "+5V_L04_P009" (solid, pour order 9): 108.106,88.637 106.606,88.637 106.206,88.236 106.206,87.835 107.204,86.837 107.206,81.228 107.126,81.148 107.022,81.036 106.406,81.036 105.806,81.636 105.806,86.336 104.606,87.536 100.24,87.536 100.24,89.471 100.717,89.948 107.817,89.948 108.406,90.536 109.106,90.536 109.206,90.436 109.206,89.436 108.521,88.821 108.337,88.637
GND on L2 (GND) "GND_L02_P003" (solid, pour order 3): 117.5,88.75 112,88.75 112,79.25 117.5,79.25 117.5,66.04 cw(c114.96,66.04) 114.96,63.5 74.5,63.5 cw(c74.5,65.5) 72.5,65.5 72.5,102.5 cw(c74.5,102.5) 74.5,104.5 114.96,104.5 cw(c114.96,101.96) 117.5,101.96
GND on L3 (GND) "GND_L03_P004" (solid, pour order 4): 117.5,79.25 112,79.25 112,88.75 117.5,88.75 117.5,101.96 ccw(c114.96,101.96) 114.96,104.5 74.5,104.5 ccw(c74.5,102.5) 72.5,102.5 72.5,65.5 ccw(c74.5,65.5) 74.5,63.5 114.96,63.5 ccw(c114.96,66.04) 117.5,66.04

## Silkscreen, mask and mechanical layers (free items; w line width, h text height)
Top Overlay:
  drawing of 18 lines, arcs and shapes, not listed
  text "+Y" at 77.052,92.752 h1.02
  text "RESET" at 107.952,91.652 h1.02
  text "AG" at 77.152,89.952 h1.02
  text "+X" at 73.652,89.252 h1.02
  text "SWD" at 94.95,89.2 h1
  text "IMU" at 78.5,88.3 h1
  text "USB" at 113.7,76.45 h1
  text "USER" at 108.352,75.152 h1.02
Bottom Overlay:
  text "1V8" at 76.36,98.8 h1.2 r90
  text "1V8" at 78.9,98.8 h1.2 r90
  text "PB8" at 81.44,98.8 h1.2 r90
  text "PA1" at 83.98,98.8 h1.2 r90
  text "GND" at 86.52,98.8 h1.2 r90
  text "PC15" at 89.06,98.8 h1.2 r90
  text "PB7" at 91.6,98.8 h1.2 r90
  text "GND" at 94.14,98.8 h1.2 r90
  text "PB6" at 96.68,98.8 h1.2 r90
  text "PB5" at 99.22,98.8 h1.2 r90
  text "GND" at 101.76,98.8 h1.2 r90
  text "PA15" at 104.3,98.8 h1.2 r90
  text "GND" at 106.84,98.8 h1.2 r90
  text "5V" at 109.38,98.8 h1.2 r90
  text "5V" at 111.92,98.8 h1.2 r90
  text "GND" at 76.36,93.7 h1.2 r90
  text "GND" at 78.9,93.7 h1.2 r90
  text "PA2" at 81.44,93.7 h1.2 r90
  text "GND" at 83.98,93.7 h1.2 r90
  text "GND" at 86.52,93.7 h1.2 r90
  text "PC14" at 89.06,93.7 h1.2 r90
  text "PC13" at 91.6,93.7 h1.2 r90
  text "GND" at 94.14,93.7 h1.2 r90
  text "PB9" at 96.68,93.7 h1.2 r90
  text "PB4" at 99.22,93.7 h1.2 r90
  text "GND" at 101.76,93.7 h1.2 r90
  text "GND" at 104.3,93.7 h1.2 r90
  text "GND" at 106.84,93.7 h1.2 r90
  text "5V" at 109.38,93.7 h1.2 r90
  text "5V" at 111.92,93.7 h1.2 r90
  text "3V3" at 76.14,79 h1.2 r90
  text "3V3" at 78.68,79 h1.2 r90
  text "PA3" at 81.22,79 h1.2 r90
  text "PA5" at 83.76,79 h1.2 r90
  text "GND" at 86.3,79 h1.2 r90
  text "PA7" at 88.84,79 h1.2 r90
  text "PB1" at 91.38,79 h1.2 r90
  text "GND" at 93.92,79 h1.2 r90
  text "PB10" at 96.46,79 h1.2 r90
  text "PB13" at 99,79 h1.2 r90
  text "GND" at 101.54,79 h1.2 r90
  text "PA8" at 104.08,79 h1.2 r90
  text "PA9" at 106.62,79 h1.2 r90
  text "GND" at 109.16,79 h1.2 r90
  text "3V3" at 111.7,79 h1.2 r90
  text "PB12" at 96.46,73.7 h1.2 r90
  text "PB14" at 99,73.7 h1.2 r90
  text "PB15" at 104.08,73.7 h1.2 r90
  text "PA10" at 111.7,73.7 h1.2 r90
  text "GND" at 73,72.717 h1.2 r135
  text "GND" at 79.2,72.7 h1.2 r90
  text "PA4" at 81.22,72.7 h1.2 r90
  text "PA6" at 83.76,72.7 h1.2 r90
  text "GND" at 86.3,72.7 h1.2 r90
  text "PB0" at 88.84,72.7 h1.2 r90
  text "PB2" at 91.38,72.7 h1.2 r90
  text "GND" at 93.92,72.7 h1.2 r90
  text "GND" at 101.5,72.7 h1.2 r90
  text "GND" at 106.6,72.7 h1.2 r90
  text "3V3" at 109.2,72.7 h1.2 r90
Mechanical 1:
  the board outline again, w0.254

## Text inside footprints (layer, text, board x,y; h text height)
D2: Mechanical 13 "+" at 104.383,95.742 h0.5 r180
D3: Mechanical 13 "+" at 98.917,82.758 h0.5